# Altium PCB AM437x_GP_EVM_PMconnect.PcbDoc
Units mil, origin at the board's own origin, x right, y up, seen from the top; angles counter-clockwise.
Board outline 6355 x 3020 mil, 2 copper layers (Top Layer, Bottom Layer); 7 components, 12 nets, 24 pads, 0 vias.
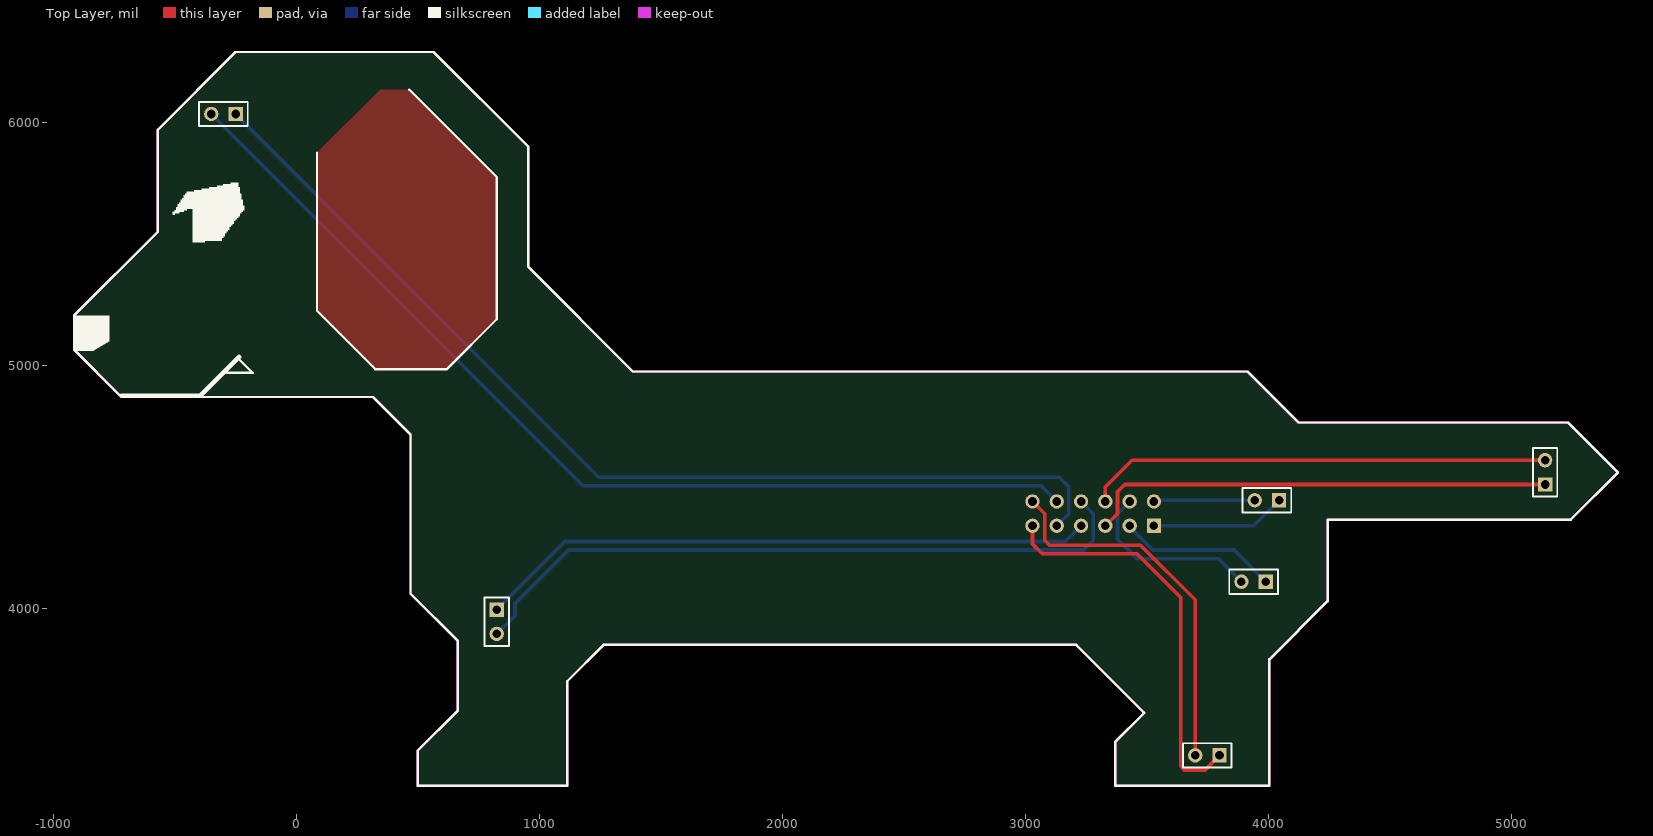
[diagram p0: Top Layer view]
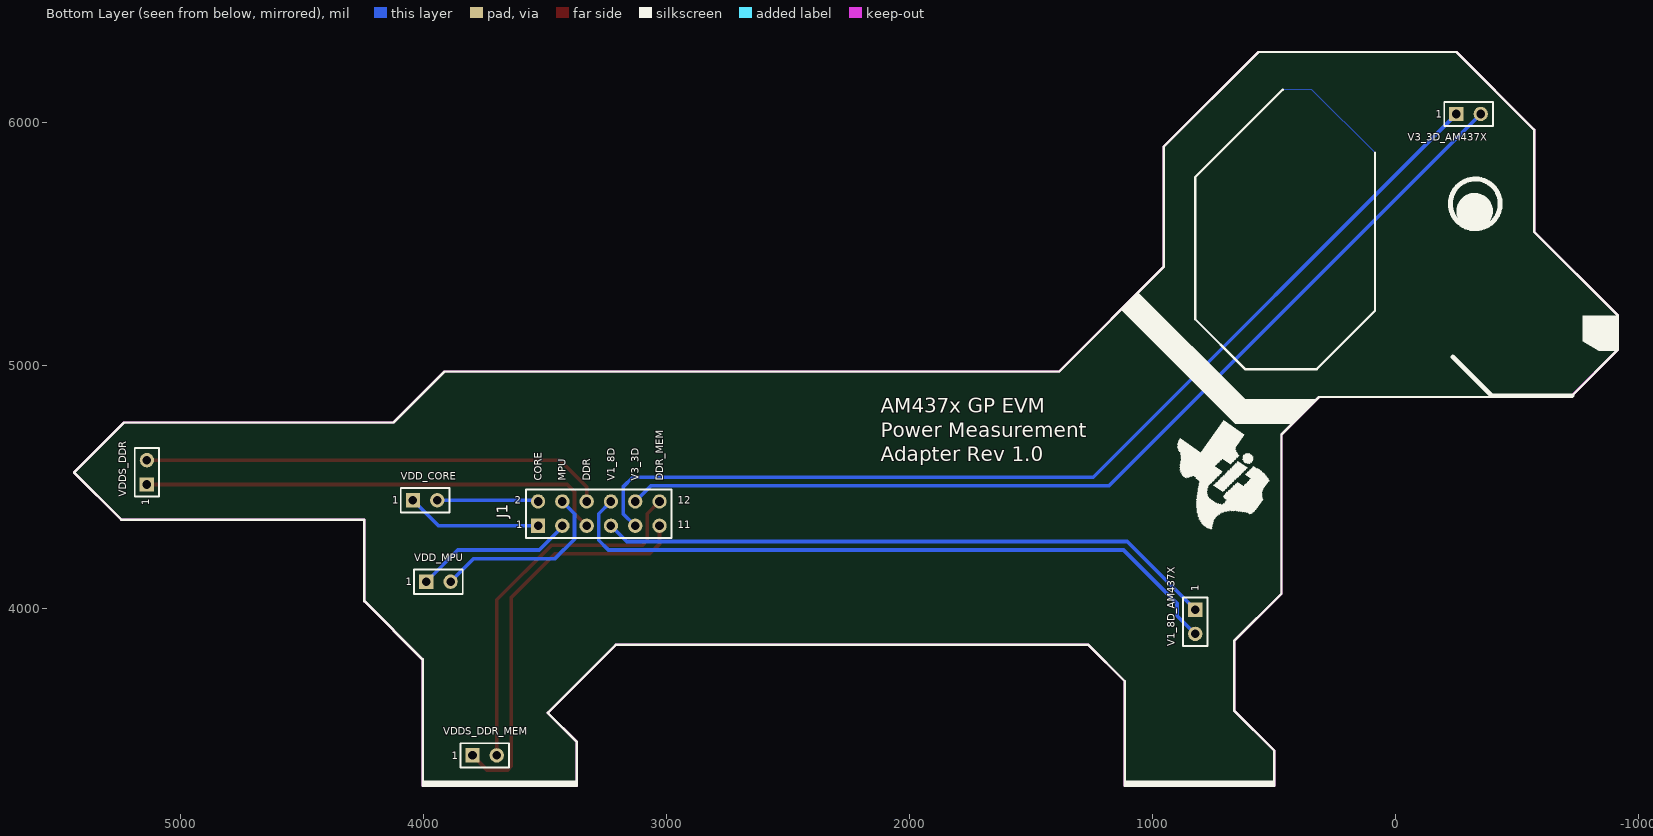
[diagram p1: Bottom Layer view, seen from below]

## Layer stack, top to bottom
Top Layer: signal copper 1.4
Dielectric: dielectric 12.6, FR-4, Dk 4.8
Bottom Layer: signal copper 1.4

## Board outline
565,6290 955,5900 955,5405 1385,4975 3915,4975 4125,4765 5235,4765 5440,4560 5245,4365 4245,4365 4245,4030 4005,3790 4005,3270 3370,3270 3370,3450 3490,3570 3210,3850 1265,3850 1115,3700 1115,3270 500,3270 500,3415 665,3580 665,3865 470,4060 470,4715 315,4870 -720,4870 -915,5065 -915,5205 -570,5550 -570,5970 -250,6290 -245,6290 565,6290 955,5900

## Design rules (kind name [scope] priority, off if disabled: settings)
Clearance [All] p1: gap=10
PolygonConnect [All] p1: connectstyle=Relief reliefconductorwidth=10 reliefentries=4 polygonreliefangle="90 Angle"
RoomDefinition AM437x_GP_EVM_PMconnect [InComponentClass('AM437x_GP_EVM_PMconnect')] p1: confinementstyle=ConfineIn formatcopy=TRUE lockcomponents=FALSE outline -1420,2600 6185,2600 6185,6920 -1420,6920
RoutingVias [All] p1: holewidth=28 width=50 viastyle="Through Hole" minholewidth=28 minwidth=50 maxholewidth=28 maxwidth=50
SilkscreenOverComponentPads [All] p1: minsilkscreentomaskgap=10
SolderMaskExpansion [All] p1: expansion=4
Width [All] p1: maxlimit=15 minlimit=15 preferedwidth=15
27 further rules are at their usual default settings.

## Components (designator, comment, footprint, x,y, rotation, side; value= is the part's Value field where it differs from the comment)
J1 "Header 6X2" HDR2X6 3530,4340 r180 bottom
V1_8D_AM437X "Header 2" HDR1X2 825,3995 r270 bottom
V3_3D_AM437X "Header 2" HDR1X2 -250,6035 r180 bottom
VDD_CORE "Header 2" HDR1X2 4045,4445 r180 bottom
VDD_MPU "Header 2" HDR1X2 3990,4110 r180 bottom
VDDS_DDR "Header 2" HDR1X2 5140,4510 r90 bottom
VDDS_DDR_MEM "Header 2" HDR1X2 3800,3395 r180 bottom

## Footprints (in the part's own frame and the unit in brackets; to place one, negate y for a bottom-side part, rotate by r counter-clockwise, add the part's x,y. Pads: shape width x height; smd on the part's side, far side on the other; paste and mask are expansions set on the pad)
HDR1X2 [mm] "Connector; Header; 2 Position"
  rect 1.5x1.5 hole 0.9: 1(0,0)
  round 1.5 hole 0.9: 2(2.54,0)
  silkscreen extent -1.27,-1.27 3.81,1.27
HDR2X6 [mm] "Connector; Header; 6x2 Position"
  rect 1.5x1.5 hole 0.9: 1(0,0)
  round 1.5 hole 0.9: 2(0,2.54) 3(2.54,0) 4(2.54,2.54) 5(5.08,0) 6(5.08,2.54) 7(7.62,0) 8(7.62,2.54) 9(10.16,0) 10(10.16,2.54) 11(12.7,0) 12(12.7,2.54)
  silkscreen extent -1.27,-1.27 13.97,3.81

## Part data
J1: "Header, 6-Pin, Dual row"
V1_8D_AM437X V3_3D_AM437X VDD_CORE VDD_MPU VDDS_DDR VDDS_DDR_MEM: "Header, 2-Pin"

## Nets (pads, with @x,y where several pads share a name; then routed paths per layer and width w, separated by ;. In a path a pad name is that pad's centre, name@x,y a point inside that pad or via, vN(x,y) a via of type N, cw(c..) or ccw(c..) an arc to the next point about the centre after c; other vN are vias at no path point)
CORE_N: J1.2 VDD_CORE.2 | length 417.1
  Bottom Layer w15: J1.2 3535,4445 VDD_CORE.2
CORE_P: J1.1 VDD_CORE.1 | length 558.5
  Bottom Layer w15: J1.1 3940,4340 VDD_CORE.1
DDR_MEM_N: J1.12 VDDS_DDR_MEM.2 | length 1542.2
  Top Layer w15: J1.12 3080,4390 3080,4280 3100,4260 3475,4260 3700,4035 VDDS_DDR_MEM.2
DDR_MEM_P: J1.11 VDDS_DDR_MEM.1 | length 1662.2
  Top Layer w15: J1.11 3030,4265 3070,4225 3460,4225 3640,4045 3640,3350 3655,3335 3740,3335 VDDS_DDR_MEM.1
DDR_N: J1.6 VDDS_DDR.2 | length 1915.6
  Top Layer w15: J1.6 3330,4500 3440,4610 VDDS_DDR.2
DDR_P: J1.5 VDDS_DDR.1 | length 1933.1
  Top Layer w15: J1.5 3380,4390 3380,4480 3410,4510 VDDS_DDR.1
MPU_N: J1.4 VDD_MPU.2 | length 758.2
  Bottom Layer w15: J1.4 3380,4390 3380,4285 3460,4205 3795,4205 VDD_MPU.2
MPU_P: J1.3 VDD_MPU.1 | length 658.2
  Bottom Layer w15: J1.3 3430,4335 3525,4240 3860,4240 VDD_MPU.1
V1_8D_N: J1.8 V1_8D_AM437X.2 | length 2824.5
  Bottom Layer w15: V1_8D_AM437X.2 900,3970 900,4020 1120,4240 3240,4240 3280,4280 3280,4390 J1.8
V1_8D_P: J1.7 V1_8D_AM437X.1 | length 2547.9
  Bottom Layer w15: V1_8D_AM437X.1 1105,4275 3165,4275 J1.7
V3_3D_N: J1.10 V3_3D_AM437X.2 | length 4140.7
  Bottom Layer w15: V3_3D_AM437X.2 1180,4505 3065,4505 J1.10
V3_3D_P: J1.9 V3_3D_AM437X.1 | length 4246.5
  Bottom Layer w15: V3_3D_AM437X.1 1245,4540 3140,4540 3180,4500 3180,4390 J1.9

## Polygon pours and split planes (outlines as drawn)
no net on Bottom Layer "Top Overlay-No Net" (solid, pour order 13): 85,5875 345,6135 465,6135 825,5775 825,5190 620,4985 325,4985 85,5225 85,5875 345,6135

## Keep-outs
Keep-Out Layer:
  lines w10: 1385,4975 3915,4975 ; 1385,4975 955,5405 955,5900 565,6290 -250,6290 -570,5970 -570,5550 -915,5205 -915,5065 -720,4870 315,4870 470,4715 470,4060 665,3865 665,3580 500,3415 500,3270 1115,3270 1115,3700 1265,3850 3210,3850 3490,3570 3370,3450 3370,3270 4005,3270 4005,3790 4245,4030 4245,4365 5245,4365 5440,4560 5235,4765 4125,4765 3915,4975 ; 1385,4975 3915,4975

## Silkscreen, mask and mechanical layers (free items; w line width, h text height)
Top Overlay:
  drawing of 46 lines, arcs and shapes, not listed
Bottom Overlay:
  drawing of 50 lines, arcs and shapes, not listed
  text "1" at -165,6020 h30
  text "AM437x GP EVM" at 2120,4805 h60
  text "Power Measurement" at 2120,4705 h60
  text "Adapter Rev 1.0" at 2120,4605 h60
  text "DDR_MEM" at 3015,4525 h30 r270
  text "V3_3D" at 3115,4525 h30 r270
  text "V1_8D" at 3215,4525 h30 r270
  text "DDR" at 3315,4525 h30 r270
  text "MPU" at 3415,4525 h30 r270
  text "CORE" at 3515,4525 h30 r270
  text "1" at 4130,4430 h30
  text "1" at 5130,4425 h30 r270
  text "1" at 4075,4095 h30
  text "1" at 810,4070 h30 r270
  text "1" at 3885,3380 h30

## Text inside footprints (layer, text, board x,y; h text height)
J1: Bottom Overlay "12" at 2955,4430 h30; Bottom Overlay "11" at 2955,4330 h30; Bottom Overlay "1" at 3620,4330 h30; Bottom Overlay "2" at 3625,4430 h30